# EAGLE board Interdigitated-Electrode-V2 (EAGLE 9.5.2)
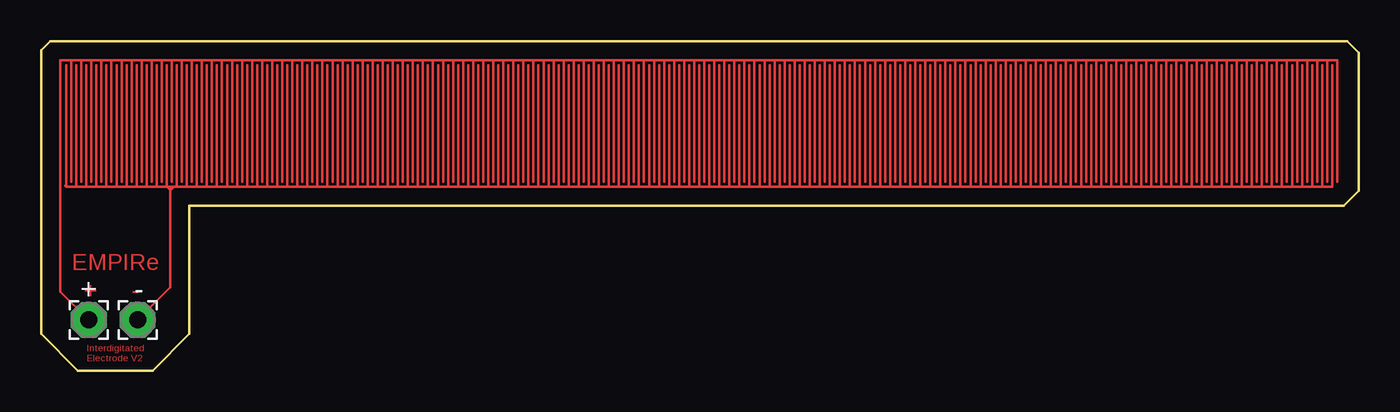
[diagram p0: board, top side]
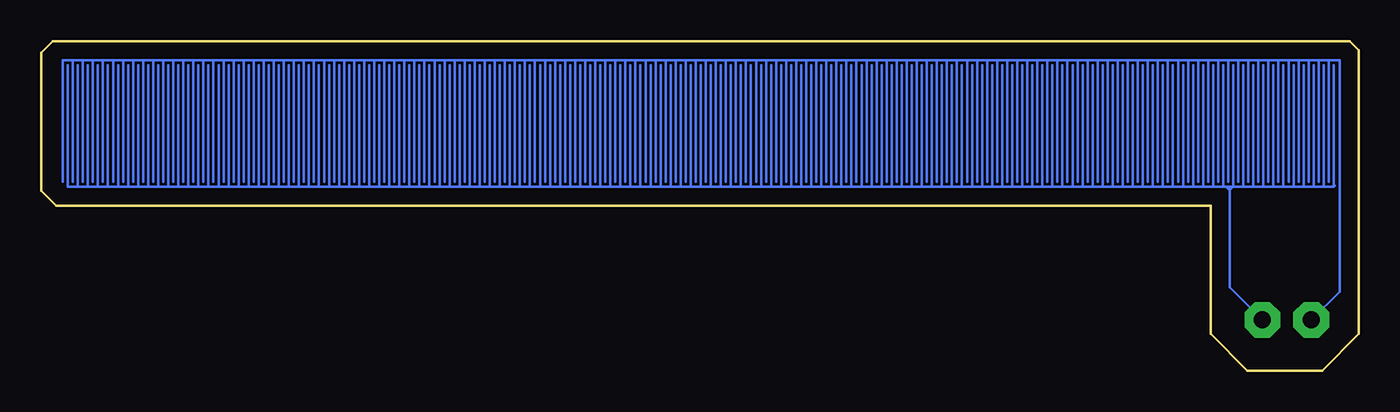
[diagram p1: board, bottom side, seen from below]

Size 80 x 20 mm. Coordinates in mm from the lower left corner, seen from the top.
Outline: 9,10 79.1,10 80,10.9 80,19.31 79.31,20 0.55,20 0,19.45 0,2.23 2.23,0 6.76,0 9,2.24 9,10
Copper layers (1*16): Top 0.035mm / dielectric 1.5mm / Bottom 0.035mm
Design rules "default": minimum track width 6mil, minimum drill 0.35mm, track to track 6mil, track to pad 6mil, pad to pad 6mil, via to via 6mil, smd to smd 6mil, copper to edge 40mil, drill to drill 6mil, minimum pad ring 10mil, minimum via ring 8mil, stop-mask expansion 4mil, vias tented up to drill 0mil, thermal gap 10mil

## Footprints (pad centres in the part's own frame; a part is rotated, then mirrored left to right if it is on the bottom)
2,15/1,0 = drill 1.016 pad 2.159 octagon: 1 0,0

## Placement (x,y rotation side)
+  [2,15/1,0]  2.89,3.08 0 top
-  [2,15/1,0]  5.86,3.08 0 top

## Library data of the parts
+ - = wirepad

## Nets
0: +.1
VCC: -.1

## Tracks (layer width: path | path; a pad name or v marks a point on that pad's centre or on a via)
0
  Top 0.152: +.1 1.17,4.8 1.17,18.83 1.83,18.83 | 1.83,18.83 2.44,18.83 | 2.44,18.83 3.05,18.83 | 3.05,18.83 3.66,18.83 | 3.66,18.83 4.27,18.83 | 4.27,18.83 4.88,18.83 | 4.88,18.83 5.49,18.83 | 5.49,18.83 6.1,18.83 | 6.1,18.83 6.71,18.83 | 6.71,18.83 7.32,18.83 | 7.32,18.83 7.93,18.83 | 7.93,18.83 8.54,18.83 | 8.54,18.83 9.15,18.83 | 9.15,18.83 9.76,18.83 | 9.76,18.83 10.37,18.83 | 10.37,18.83 10.98,18.83 | 10.98,18.83 11.59,18.83 | 11.59,18.83 12.2,18.83 | 12.2,18.83 12.81,18.83 | 12.81,18.83 13.42,18.83 | 13.42,18.83 14.03,18.83 | 14.03,18.83 14.64,18.83 | 14.64,18.83 15.25,18.83 | 15.25,18.83 15.86,18.83 | 15.86,18.83 16.47,18.83 | 16.47,18.83 17.08,18.83 | 17.08,18.83 17.69,18.83 | 17.69,18.83 18.3,18.83 | 18.3,18.83 18.91,18.83 | 18.91,18.83 19.52,18.83 | 19.52,18.83 20.13,18.83 | 20.13,18.83 20.74,18.83 | 20.74,18.83 21.35,18.83 | 21.35,18.83 21.96,18.83 | 21.96,18.83 22.57,18.83 | 22.57,18.83 23.18,18.83 | 23.18,18.83 23.79,18.83 | 23.79,18.83 24.4,18.83 | 24.4,18.83 25.01,18.83 | 25.01,18.83 25.62,18.83 | 25.62,18.83 26.23,18.83 | 26.23,18.83 26.84,18.83 | 26.84,18.83 27.45,18.83 | 27.45,18.83 28.06,18.83 | 28.06,18.83 28.67,18.83 | 28.67,18.83 29.28,18.83 | 29.28,18.83 29.89,18.83 | 29.89,18.83 30.5,18.83 | 30.5,18.83 31.11,18.83 | 31.11,18.83 31.72,18.83 | 31.72,18.83 32.33,18.83 | 32.33,18.83 32.94,18.83 | 32.94,18.83 33.55,18.83 | 33.55,18.83 34.16,18.83 | 34.16,18.83 34.77,18.83 | 34.77,18.83 35.38,18.83 | 35.38,18.83 35.99,18.83 | 35.99,18.83 36.6,18.83 | 36.6,18.83 37.21,18.83 | 37.21,18.83 37.82,18.83 | 37.82,18.83 38.43,18.83 | 38.43,18.83 39.04,18.83 | 39.04,18.83 39.65,18.83 | 39.65,18.83 40.26,18.83 | 40.26,18.83 40.87,18.83 | 40.87,18.83 41.48,18.83 | 41.48,18.83 42.09,18.83
  Top 0.152: 42.09,18.83 42.7,18.83 | 42.7,18.83 43.31,18.83 | 43.31,18.83 43.92,18.83 | 43.92,18.83 44.53,18.83 | 44.53,18.83 45.14,18.83 | 45.14,18.83 45.75,18.83 | 45.75,18.83 46.36,18.83 | 46.36,18.83 46.97,18.83 | 46.97,18.83 47.58,18.83 | 47.58,18.83 48.19,18.83 | 48.19,18.83 48.8,18.83 | 48.8,18.83 49.41,18.83 | 49.41,18.83 50.02,18.83 | 50.02,18.83 50.63,18.83 | 50.63,18.83 51.24,18.83 | 51.24,18.83 51.85,18.83 | 51.85,18.83 52.46,18.83 | 52.46,18.83 53.07,18.83 | 53.07,18.83 53.68,18.83 | 53.68,18.83 54.29,18.83 | 54.29,18.83 54.9,18.83 | 54.9,18.83 55.51,18.83 | 55.51,18.83 56.12,18.83 | 56.12,18.83 56.73,18.83 | 56.73,18.83 57.34,18.83 | 57.34,18.83 57.95,18.83 | 57.95,18.83 58.56,18.83 | 58.56,18.83 59.17,18.83 | 59.17,18.83 59.78,18.83 | 59.78,18.83 60.39,18.83 | 60.39,18.83 61,18.83 | 61,18.83 61.61,18.83 | 61.61,18.83 62.22,18.83 | 62.22,18.83 62.83,18.83 | 62.83,18.83 63.44,18.83 | 63.44,18.83 64.05,18.83 | 64.05,18.83 64.66,18.83 | 64.66,18.83 65.27,18.83 | 65.27,18.83 65.88,18.83 | 65.88,18.83 66.49,18.83 | 66.49,18.83 67.1,18.83 | 67.1,18.83 67.71,18.83 | 67.71,18.83 68.32,18.83 | 68.32,18.83 68.93,18.83 | 68.93,18.83 69.54,18.83 | 69.54,18.83 70.15,18.83 | 70.15,18.83 70.76,18.83 | 70.76,18.83 71.37,18.83 | 71.37,18.83 71.98,18.83 | 71.98,18.83 72.59,18.83 | 72.59,18.83 73.2,18.83 | 73.2,18.83 73.81,18.83 | 73.81,18.83 74.42,18.83 | 74.42,18.83 75.03,18.83 | 75.03,18.83 75.64,18.83 | 75.64,18.83 76.25,18.83 | 76.25,18.83 76.86,18.83 | 76.86,18.83 77.47,18.83 | 77.47,18.83 78.08,18.83 | 78.08,18.83 78.69,18.83 78.69,11.47 | 1.83,18.83 1.83,11.47 | 2.44,18.83 2.44,11.47 | 3.05,18.83 3.05,11.47 | 3.66,18.83 3.66,11.47 | 4.27,18.83 4.27,11.47 | 4.88,18.83 4.88,11.47
  Top 0.152: 5.49,18.83 5.49,11.47 | 6.1,18.83 6.1,11.47 | 6.71,18.83 6.71,11.47 | 7.32,18.83 7.32,11.47 | 7.93,18.83 7.93,11.47 | 8.54,18.83 8.54,11.47 | 9.15,18.83 9.15,11.47 | 9.76,18.83 9.76,11.47 | 10.37,18.83 10.37,11.47 | 10.98,18.83 10.98,11.47 | 11.59,18.83 11.59,11.47 | 12.2,18.83 12.2,11.47 | 12.81,18.83 12.81,11.47 | 13.42,18.83 13.42,11.47 | 14.03,18.83 14.03,11.47 | 14.64,18.83 14.64,11.47 | 15.25,18.83 15.25,11.47 | 15.86,18.83 15.86,11.47 | 16.47,18.83 16.47,11.47 | 17.08,18.83 17.08,11.47 | 17.69,18.83 17.69,11.47 | 18.3,18.83 18.3,11.47 | 18.91,18.83 18.91,11.47 | 19.52,18.83 19.52,11.47 | 20.13,18.83 20.13,11.47 | 20.74,18.83 20.74,11.47 | 21.35,18.83 21.35,11.47 | 21.96,18.83 21.96,11.47 | 22.57,18.83 22.57,11.47 | 23.18,18.83 23.18,11.47 | 23.79,18.83 23.79,11.47 | 24.4,18.83 24.4,11.47 | 25.01,18.83 25.01,11.47 | 25.62,18.83 25.62,11.47 | 26.23,18.83 26.23,11.47 | 26.84,18.83 26.84,11.47 | 27.45,18.83 27.45,11.47 | 28.06,18.83 28.06,11.47 | 28.67,18.83 28.67,11.47 | 29.28,18.83 29.28,11.47 | 29.89,18.83 29.89,11.47 | 30.5,18.83 30.5,11.47 | 31.11,18.83 31.11,11.47 | 31.72,18.83 31.72,11.47 | 32.33,18.83 32.33,11.47 | 32.94,18.83 32.94,11.47 | 33.55,18.83 33.55,11.47 | 34.16,18.83 34.16,11.47 | 34.77,18.83 34.77,11.47 | 35.38,18.83 35.38,11.47 | 35.99,18.83 35.99,11.47 | 36.6,18.83 36.6,11.47 | 37.21,18.83 37.21,11.47 | 37.82,18.83 37.82,11.47 | 38.43,18.83 38.43,11.47 | 39.04,18.83 39.04,11.47 | 39.65,18.83 39.65,11.47 | 40.26,18.83 40.26,11.47 | 40.87,18.83 40.87,11.47 | 41.48,18.83 41.48,11.47 | 42.09,18.83 42.09,11.47 | 42.7,18.83 42.7,11.47 | 43.31,18.83 43.31,11.47 | 43.92,18.83 43.92,11.47 | 44.53,18.83 44.53,11.47 | 45.14,18.83 45.14,11.47 | 45.75,18.83 45.75,11.47
  Top 0.152: 46.36,18.83 46.36,11.47 | 46.97,18.83 46.97,11.47 | 47.58,18.83 47.58,11.47 | 48.19,18.83 48.19,11.47 | 48.8,18.83 48.8,11.47 | 49.41,18.83 49.41,11.47 | 50.02,18.83 50.02,11.47 | 50.63,18.83 50.63,11.47 | 51.24,18.83 51.24,11.47 | 51.85,18.83 51.85,11.47 | 52.46,18.83 52.46,11.47 | 53.07,18.83 53.07,11.47 | 53.68,18.83 53.68,11.47 | 54.29,18.83 54.29,11.47 | 54.9,18.83 54.9,11.47 | 55.51,18.83 55.51,11.47 | 56.12,18.83 56.12,11.47 | 56.73,18.83 56.73,11.47 | 57.34,18.83 57.34,11.47 | 57.95,18.83 57.95,11.47 | 58.56,18.83 58.56,11.47 | 59.17,18.83 59.17,11.47 | 59.78,18.83 59.78,11.47 | 60.39,18.83 60.39,11.47 | 61,18.83 61,11.47 | 61.61,18.83 61.61,11.47 | 62.22,18.83 62.22,11.47 | 62.83,18.83 62.83,11.47 | 63.44,18.83 63.44,11.47 | 64.05,18.83 64.05,11.47 | 64.66,18.83 64.66,11.47 | 65.27,18.83 65.27,11.47 | 65.88,18.83 65.88,11.47 | 66.49,18.83 66.49,11.47 | 67.1,18.83 67.1,11.47 | 67.71,18.83 67.71,11.47 | 68.32,18.83 68.32,11.47 | 68.93,18.83 68.93,11.47 | 69.54,18.83 69.54,11.47 | 70.15,18.83 70.15,11.47 | 70.76,18.83 70.76,11.47 | 71.37,18.83 71.37,11.47 | 71.98,18.83 71.98,11.47 | 72.59,18.83 72.59,11.47 | 73.2,18.83 73.2,11.47 | 73.81,18.83 73.81,11.47 | 74.42,18.83 74.42,11.47 | 75.03,18.83 75.03,11.47 | 75.64,18.83 75.64,11.47 | 76.25,18.83 76.25,11.47 | 76.86,18.83 76.86,11.47 | 77.47,18.83 77.47,11.47 | 78.08,18.83 78.08,11.47
1
  Bottom 0.152: 2.89,3.08 1.17,4.8 1.17,18.83 1.83,18.83 | 1.83,18.83 2.44,18.83 | 2.44,18.83 3.05,18.83 | 3.05,18.83 3.66,18.83 | 3.66,18.83 4.27,18.83 | 4.27,18.83 4.88,18.83 | 4.88,18.83 5.49,18.83 | 5.49,18.83 6.1,18.83 | 6.1,18.83 6.71,18.83 | 6.71,18.83 7.32,18.83 | 7.32,18.83 7.93,18.83 | 7.93,18.83 8.54,18.83 | 8.54,18.83 9.15,18.83 | 9.15,18.83 9.76,18.83 | 9.76,18.83 10.37,18.83 | 10.37,18.83 10.98,18.83 | 10.98,18.83 11.59,18.83 | 11.59,18.83 12.2,18.83 | 12.2,18.83 12.81,18.83 | 12.81,18.83 13.42,18.83 | 13.42,18.83 14.03,18.83 | 14.03,18.83 14.64,18.83 | 14.64,18.83 15.25,18.83 | 15.25,18.83 15.86,18.83 | 15.86,18.83 16.47,18.83 | 16.47,18.83 17.08,18.83 | 17.08,18.83 17.69,18.83 | 17.69,18.83 18.3,18.83 | 18.3,18.83 18.91,18.83 | 18.91,18.83 19.52,18.83 | 19.52,18.83 20.13,18.83 | 20.13,18.83 20.74,18.83 | 20.74,18.83 21.35,18.83 | 21.35,18.83 21.96,18.83 | 21.96,18.83 22.57,18.83 | 22.57,18.83 23.18,18.83 | 23.18,18.83 23.79,18.83 | 23.79,18.83 24.4,18.83 | 24.4,18.83 25.01,18.83 | 25.01,18.83 25.62,18.83 | 25.62,18.83 26.23,18.83 | 26.23,18.83 26.84,18.83 | 26.84,18.83 27.45,18.83 | 27.45,18.83 28.06,18.83 | 28.06,18.83 28.67,18.83 | 28.67,18.83 29.28,18.83 | 29.28,18.83 29.89,18.83 | 29.89,18.83 30.5,18.83 | 30.5,18.83 31.11,18.83 | 31.11,18.83 31.72,18.83 | 31.72,18.83 32.33,18.83 | 32.33,18.83 32.94,18.83 | 32.94,18.83 33.55,18.83 | 33.55,18.83 34.16,18.83 | 34.16,18.83 34.77,18.83 | 34.77,18.83 35.38,18.83 | 35.38,18.83 35.99,18.83 | 35.99,18.83 36.6,18.83 | 36.6,18.83 37.21,18.83 | 37.21,18.83 37.82,18.83 | 37.82,18.83 38.43,18.83 | 38.43,18.83 39.04,18.83 | 39.04,18.83 39.65,18.83 | 39.65,18.83 40.26,18.83 | 40.26,18.83 40.87,18.83 | 40.87,18.83 41.48,18.83 | 41.48,18.83 42.09,18.83
  Bottom 0.152: 42.09,18.83 42.7,18.83 | 42.7,18.83 43.31,18.83 | 43.31,18.83 43.92,18.83 | 43.92,18.83 44.53,18.83 | 44.53,18.83 45.14,18.83 | 45.14,18.83 45.75,18.83 | 45.75,18.83 46.36,18.83 | 46.36,18.83 46.97,18.83 | 46.97,18.83 47.58,18.83 | 47.58,18.83 48.19,18.83 | 48.19,18.83 48.8,18.83 | 48.8,18.83 49.41,18.83 | 49.41,18.83 50.02,18.83 | 50.02,18.83 50.63,18.83 | 50.63,18.83 51.24,18.83 | 51.24,18.83 51.85,18.83 | 51.85,18.83 52.46,18.83 | 52.46,18.83 53.07,18.83 | 53.07,18.83 53.68,18.83 | 53.68,18.83 54.29,18.83 | 54.29,18.83 54.9,18.83 | 54.9,18.83 55.51,18.83 | 55.51,18.83 56.12,18.83 | 56.12,18.83 56.73,18.83 | 56.73,18.83 57.34,18.83 | 57.34,18.83 57.95,18.83 | 57.95,18.83 58.56,18.83 | 58.56,18.83 59.17,18.83 | 59.17,18.83 59.78,18.83 | 59.78,18.83 60.39,18.83 | 60.39,18.83 61,18.83 | 61,18.83 61.61,18.83 | 61.61,18.83 62.22,18.83 | 62.22,18.83 62.83,18.83 | 62.83,18.83 63.44,18.83 | 63.44,18.83 64.05,18.83 | 64.05,18.83 64.66,18.83 | 64.66,18.83 65.27,18.83 | 65.27,18.83 65.88,18.83 | 65.88,18.83 66.49,18.83 | 66.49,18.83 67.1,18.83 | 67.1,18.83 67.71,18.83 | 67.71,18.83 68.32,18.83 | 68.32,18.83 68.93,18.83 | 68.93,18.83 69.54,18.83 | 69.54,18.83 70.15,18.83 | 70.15,18.83 70.76,18.83 | 70.76,18.83 71.37,18.83 | 71.37,18.83 71.98,18.83 | 71.98,18.83 72.59,18.83 | 72.59,18.83 73.2,18.83 | 73.2,18.83 73.81,18.83 | 73.81,18.83 74.42,18.83 | 74.42,18.83 75.03,18.83 | 75.03,18.83 75.64,18.83 | 75.64,18.83 76.25,18.83 | 76.25,18.83 76.86,18.83 | 76.86,18.83 77.47,18.83 | 77.47,18.83 78.08,18.83 | 78.08,18.83 78.69,18.83 78.69,11.47 | 1.83,18.83 1.83,11.47 | 2.44,18.83 2.44,11.47 | 3.05,18.83 3.05,11.47 | 3.66,18.83 3.66,11.47 | 4.27,18.83 4.27,11.47 | 4.88,18.83 4.88,11.47
  Bottom 0.152: 5.49,18.83 5.49,11.47 | 6.1,18.83 6.1,11.47 | 6.71,18.83 6.71,11.47 | 7.32,18.83 7.32,11.47 | 7.93,18.83 7.93,11.47 | 8.54,18.83 8.54,11.47 | 9.15,18.83 9.15,11.47 | 9.76,18.83 9.76,11.47 | 10.37,18.83 10.37,11.47 | 10.98,18.83 10.98,11.47 | 11.59,18.83 11.59,11.47 | 12.2,18.83 12.2,11.47 | 12.81,18.83 12.81,11.47 | 13.42,18.83 13.42,11.47 | 14.03,18.83 14.03,11.47 | 14.64,18.83 14.64,11.47 | 15.25,18.83 15.25,11.47 | 15.86,18.83 15.86,11.47 | 16.47,18.83 16.47,11.47 | 17.08,18.83 17.08,11.47 | 17.69,18.83 17.69,11.47 | 18.3,18.83 18.3,11.47 | 18.91,18.83 18.91,11.47 | 19.52,18.83 19.52,11.47 | 20.13,18.83 20.13,11.47 | 20.74,18.83 20.74,11.47 | 21.35,18.83 21.35,11.47 | 21.96,18.83 21.96,11.47 | 22.57,18.83 22.57,11.47 | 23.18,18.83 23.18,11.47 | 23.79,18.83 23.79,11.47 | 24.4,18.83 24.4,11.47 | 25.01,18.83 25.01,11.47 | 25.62,18.83 25.62,11.47 | 26.23,18.83 26.23,11.47 | 26.84,18.83 26.84,11.47 | 27.45,18.83 27.45,11.47 | 28.06,18.83 28.06,11.47 | 28.67,18.83 28.67,11.47 | 29.28,18.83 29.28,11.47 | 29.89,18.83 29.89,11.47 | 30.5,18.83 30.5,11.47 | 31.11,18.83 31.11,11.47 | 31.72,18.83 31.72,11.47 | 32.33,18.83 32.33,11.47 | 32.94,18.83 32.94,11.47 | 33.55,18.83 33.55,11.47 | 34.16,18.83 34.16,11.47 | 34.77,18.83 34.77,11.47 | 35.38,18.83 35.38,11.47 | 35.99,18.83 35.99,11.47 | 36.6,18.83 36.6,11.47 | 37.21,18.83 37.21,11.47 | 37.82,18.83 37.82,11.47 | 38.43,18.83 38.43,11.47 | 39.04,18.83 39.04,11.47 | 39.65,18.83 39.65,11.47 | 40.26,18.83 40.26,11.47 | 40.87,18.83 40.87,11.47 | 41.48,18.83 41.48,11.47 | 42.09,18.83 42.09,11.47 | 42.7,18.83 42.7,11.47 | 43.31,18.83 43.31,11.47 | 43.92,18.83 43.92,11.47 | 44.53,18.83 44.53,11.47 | 45.14,18.83 45.14,11.47 | 45.75,18.83 45.75,11.47
  Bottom 0.152: 46.36,18.83 46.36,11.47 | 46.97,18.83 46.97,11.47 | 47.58,18.83 47.58,11.47 | 48.19,18.83 48.19,11.47 | 48.8,18.83 48.8,11.47 | 49.41,18.83 49.41,11.47 | 50.02,18.83 50.02,11.47 | 50.63,18.83 50.63,11.47 | 51.24,18.83 51.24,11.47 | 51.85,18.83 51.85,11.47 | 52.46,18.83 52.46,11.47 | 53.07,18.83 53.07,11.47 | 53.68,18.83 53.68,11.47 | 54.29,18.83 54.29,11.47 | 54.9,18.83 54.9,11.47 | 55.51,18.83 55.51,11.47 | 56.12,18.83 56.12,11.47 | 56.73,18.83 56.73,11.47 | 57.34,18.83 57.34,11.47 | 57.95,18.83 57.95,11.47 | 58.56,18.83 58.56,11.47 | 59.17,18.83 59.17,11.47 | 59.78,18.83 59.78,11.47 | 60.39,18.83 60.39,11.47 | 61,18.83 61,11.47 | 61.61,18.83 61.61,11.47 | 62.22,18.83 62.22,11.47 | 62.83,18.83 62.83,11.47 | 63.44,18.83 63.44,11.47 | 64.05,18.83 64.05,11.47 | 64.66,18.83 64.66,11.47 | 65.27,18.83 65.27,11.47 | 65.88,18.83 65.88,11.47 | 66.49,18.83 66.49,11.47 | 67.1,18.83 67.1,11.47 | 67.71,18.83 67.71,11.47 | 68.32,18.83 68.32,11.47 | 68.93,18.83 68.93,11.47 | 69.54,18.83 69.54,11.47 | 70.15,18.83 70.15,11.47 | 70.76,18.83 70.76,11.47 | 71.37,18.83 71.37,11.47 | 71.98,18.83 71.98,11.47 | 72.59,18.83 72.59,11.47 | 73.2,18.83 73.2,11.47 | 73.81,18.83 73.81,11.47 | 74.42,18.83 74.42,11.47 | 75.03,18.83 75.03,11.47 | 75.64,18.83 75.64,11.47 | 76.25,18.83 76.25,11.47 | 76.86,18.83 76.86,11.47 | 77.47,18.83 77.47,11.47 | 78.08,18.83 78.08,11.47
VCC
  Top 0.152: -.1 7.83,5.05 7.83,10.92 | 1.52,11.17 2.13,11.17 | 2.13,11.17 2.74,11.17 | 2.74,11.17 3.35,11.17 | 3.35,11.17 3.96,11.17 | 3.96,11.17 4.57,11.17 | 4.57,11.17 5.18,11.17 | 5.18,11.17 5.79,11.17 | 5.79,11.17 6.4,11.17 | 6.4,11.17 7.01,11.17 | 7.01,11.17 7.62,11.17 | 7.62,11.17 | 7.62,11.17 7.92,11.17 | 7.92,11.17 8.08,11.17 | 8.08,11.17 8.23,11.17 | 8.23,11.17 8.84,11.17 | 8.84,11.17 9.45,11.17 | 9.45,11.17 10.06,11.17 | 10.06,11.17 10.67,11.17 | 10.67,11.17 11.28,11.17 | 11.28,11.17 11.89,11.17 | 11.89,11.17 12.5,11.17 | 12.5,11.17 13.11,11.17 | 13.11,11.17 13.72,11.17 | 13.72,11.17 14.33,11.17 | 14.33,11.17 14.94,11.17 | 14.94,11.17 15.55,11.17 | 15.55,11.17 16.16,11.17 | 16.16,11.17 16.77,11.17 | 16.77,11.17 17.38,11.17 | 17.38,11.17 17.99,11.17 | 17.99,11.17 18.6,11.17 | 18.6,11.17 19.21,11.17 | 19.21,11.17 19.82,11.17 | 19.82,11.17 20.43,11.17 | 20.43,11.17 21.04,11.17 | 21.04,11.17 21.65,11.17 | 21.65,11.17 22.26,11.17 | 22.26,11.17 22.87,11.17 | 22.87,11.17 23.48,11.17 | 23.48,11.17 24.09,11.17 | 24.09,11.17 24.7,11.17 | 24.7,11.17 25.31,11.17 | 25.31,11.17 25.92,11.17 | 25.92,11.17 26.53,11.17 | 26.53,11.17 27.14,11.17 | 27.14,11.17 27.75,11.17 | 27.75,11.17 28.36,11.17 | 28.36,11.17 28.97,11.17 | 28.97,11.17 29.58,11.17 | 29.58,11.17 30.19,11.17 | 30.19,11.17 30.8,11.17 | 30.8,11.17 31.41,11.17 | 31.41,11.17 32.02,11.17 | 32.02,11.17 32.63,11.17 | 32.63,11.17 33.24,11.17 | 33.24,11.17 33.85,11.17 | 33.85,11.17 34.46,11.17 | 34.46,11.17 35.07,11.17 | 35.07,11.17 35.68,11.17 | 35.68,11.17 36.29,11.17 | 36.29,11.17 36.9,11.17 | 36.9,11.17 37.51,11.17 | 37.51,11.17 38.12,11.17 | 38.12,11.17 38.73,11.17 | 38.73,11.17 39.34,11.17 | 39.34,11.17 39.95,11.17 | 39.95,11.17 40.56,11.17
  Top 0.152: 40.56,11.17 41.17,11.17 | 41.17,11.17 41.78,11.17 | 41.78,11.17 42.39,11.17 | 42.39,11.17 43,11.17 | 43,11.17 43.61,11.17 | 43.61,11.17 44.22,11.17 | 44.22,11.17 44.83,11.17 | 44.83,11.17 45.44,11.17 | 45.44,11.17 46.05,11.17 | 46.05,11.17 46.66,11.17 | 46.66,11.17 47.27,11.17 | 47.27,11.17 47.88,11.17 | 47.88,11.17 48.49,11.17 | 48.49,11.17 49.1,11.17 | 49.1,11.17 49.71,11.17 | 49.71,11.17 50.32,11.17 | 50.32,11.17 50.93,11.17 | 50.93,11.17 51.54,11.17 | 51.54,11.17 52.15,11.17 | 52.15,11.17 52.76,11.17 | 52.76,11.17 53.37,11.17 | 53.37,11.17 53.98,11.17 | 53.98,11.17 54.59,11.17 | 54.59,11.17 55.2,11.17 | 55.2,11.17 55.81,11.17 | 55.81,11.17 56.42,11.17 | 56.42,11.17 57.03,11.17 | 57.03,11.17 57.64,11.17 | 57.64,11.17 58.25,11.17 | 58.25,11.17 58.86,11.17 | 58.86,11.17 59.47,11.17 | 59.47,11.17 60.08,11.17 | 60.08,11.17 60.69,11.17 | 60.69,11.17 61.3,11.17 | 61.3,11.17 61.91,11.17 | 61.91,11.17 62.52,11.17 | 62.52,11.17 63.13,11.17 | 63.13,11.17 63.74,11.17 | 63.74,11.17 64.35,11.17 | 64.35,11.17 64.96,11.17 | 64.96,11.17 65.57,11.17 | 65.57,11.17 66.18,11.17 | 66.18,11.17 66.79,11.17 | 66.79,11.17 67.4,11.17 | 67.4,11.17 68.01,11.17 | 68.01,11.17 68.62,11.17 | 68.62,11.17 69.23,11.17 | 69.23,11.17 69.84,11.17 | 69.84,11.17 70.45,11.17 | 70.45,11.17 71.06,11.17 | 71.06,11.17 71.67,11.17 | 71.67,11.17 72.28,11.17 | 72.28,11.17 72.89,11.17 | 72.89,11.17 73.5,11.17 | 73.5,11.17 74.11,11.17 | 74.11,11.17 74.72,11.17 | 74.72,11.17 75.33,11.17 | 75.33,11.17 75.94,11.17 | 75.94,11.17 76.55,11.17 | 76.55,11.17 77.16,11.17 | 77.16,11.17 77.77,11.17 | 77.77,11.17 78.38,11.17 78.38,18.53 | 1.47,11.22 1.52,11.17 | 7.92,11.17 7.83,11.07 7.83,10.96 | 8.08,11.17 7.83,10.92 | 7.83,10.92 7.83,10.96
  Top 0.152: 7.83,10.96 7.62,11.17 | 1.52,11.17 1.52,18.53 | 2.13,11.17 2.13,18.53 | 2.74,11.17 2.74,18.53 | 3.35,11.17 3.35,18.53 | 3.96,11.17 3.96,18.53 | 4.57,11.17 4.57,18.53 | 5.18,11.17 5.18,18.53 | 5.79,11.17 5.79,18.53 | 6.4,11.17 6.4,18.53 | 7.01,11.17 7.01,18.53 | 7.62,11.17 7.62,18.53 | 8.23,11.17 8.23,18.53 | 8.84,11.17 8.84,18.53 | 9.45,11.17 9.45,18.53 | 10.06,11.17 10.06,18.53 | 10.67,11.17 10.67,18.53 | 11.28,11.17 11.28,18.53 | 11.89,11.17 11.89,18.53 | 12.5,11.17 12.5,18.53 | 13.11,11.17 13.11,18.53 | 13.72,11.17 13.72,18.53 | 14.33,11.17 14.33,18.53 | 14.94,11.17 14.94,18.53 | 15.55,11.17 15.55,18.53 | 16.16,11.17 16.16,18.53 | 16.77,11.17 16.77,18.53 | 17.38,11.17 17.38,18.53 | 17.99,11.17 17.99,18.53 | 18.6,11.17 18.6,18.53 | 19.21,11.17 19.21,18.53 | 19.82,11.17 19.82,18.53 | 20.43,11.17 20.43,18.53 | 21.04,11.17 21.04,18.53 | 21.65,11.17 21.65,18.53 | 22.26,11.17 22.26,18.53 | 22.87,11.17 22.87,18.53 | 23.48,11.17 23.48,18.53 | 24.09,11.17 24.09,18.53 | 24.7,11.17 24.7,18.53 | 25.31,11.17 25.31,18.53 | 25.92,11.17 25.92,18.53 | 26.53,11.17 26.53,18.53 | 27.14,11.17 27.14,18.53 | 27.75,11.17 27.75,18.53 | 28.36,11.17 28.36,18.53 | 28.97,11.17 28.97,18.53 | 29.58,11.17 29.58,18.53 | 30.19,11.17 30.19,18.53 | 30.8,11.17 30.8,18.53 | 31.41,11.17 31.41,18.53 | 32.02,11.17 32.02,18.53 | 32.63,11.17 32.63,18.53 | 33.24,11.17 33.24,18.53 | 33.85,11.17 33.85,18.53 | 34.46,11.17 34.46,18.53 | 35.07,11.17 35.07,18.53 | 35.68,11.17 35.68,18.53 | 36.29,11.17 36.29,18.53 | 36.9,11.17 36.9,18.53 | 37.51,11.17 37.51,18.53 | 38.12,11.17 38.12,18.53 | 38.73,11.17 38.73,18.53 | 39.34,11.17 39.34,18.53 | 39.95,11.17 39.95,18.53 | 40.56,11.17 40.56,18.53 | 41.17,11.17 41.17,18.53 | 41.78,11.17 41.78,18.53
  Top 0.152: 42.39,11.17 42.39,18.53 | 43,11.17 43,18.53 | 43.61,11.17 43.61,18.53 | 44.22,11.17 44.22,18.53 | 44.83,11.17 44.83,18.53 | 45.44,11.17 45.44,18.53 | 46.05,11.17 46.05,18.53 | 46.66,11.17 46.66,18.53 | 47.27,11.17 47.27,18.53 | 47.88,11.17 47.88,18.53 | 48.49,11.17 48.49,18.53 | 49.1,11.17 49.1,18.53 | 49.71,11.17 49.71,18.53 | 50.32,11.17 50.32,18.53 | 50.93,11.17 50.93,18.53 | 51.54,11.17 51.54,18.53 | 52.15,11.17 52.15,18.53 | 52.76,11.17 52.76,18.53 | 53.37,11.17 53.37,18.53 | 53.98,11.17 53.98,18.53 | 54.59,11.17 54.59,18.53 | 55.2,11.17 55.2,18.53 | 55.81,11.17 55.81,18.53 | 56.42,11.17 56.42,18.53 | 57.03,11.17 57.03,18.53 | 57.64,11.17 57.64,18.53 | 58.25,11.17 58.25,18.53 | 58.86,11.17 58.86,18.53 | 59.47,11.17 59.47,18.53 | 60.08,11.17 60.08,18.53 | 60.69,11.17 60.69,18.53 | 61.3,11.17 61.3,18.53 | 61.91,11.17 61.91,18.53 | 62.52,11.17 62.52,18.53 | 63.13,11.17 63.13,18.53 | 63.74,11.17 63.74,18.53 | 64.35,11.17 64.35,18.53 | 64.96,11.17 64.96,18.53 | 65.57,11.17 65.57,18.53 | 66.18,11.17 66.18,18.53 | 66.79,11.17 66.79,18.53 | 67.4,11.17 67.4,18.53 | 68.01,11.17 68.01,18.53 | 68.62,11.17 68.62,18.53 | 69.23,11.17 69.23,18.53 | 69.84,11.17 69.84,18.53 | 70.45,11.17 70.45,18.53 | 71.06,11.17 71.06,18.53 | 71.67,11.17 71.67,18.53 | 72.28,11.17 72.28,18.53 | 72.89,11.17 72.89,18.53 | 73.5,11.17 73.5,18.53 | 74.11,11.17 74.11,18.53 | 74.72,11.17 74.72,18.53 | 75.33,11.17 75.33,18.53 | 75.94,11.17 75.94,18.53 | 76.55,11.17 76.55,18.53 | 77.16,11.17 77.16,18.53 | 77.77,11.17 77.77,18.53
VCC1
  Bottom 0.152: 5.86,3.08 7.83,5.05 7.83,10.92 | 1.52,11.17 2.13,11.17 | 2.13,11.17 2.74,11.17 | 2.74,11.17 3.35,11.17 | 3.35,11.17 3.96,11.17 | 3.96,11.17 4.57,11.17 | 4.57,11.17 5.18,11.17 | 5.18,11.17 5.79,11.17 | 5.79,11.17 6.4,11.17 | 6.4,11.17 7.01,11.17 | 7.01,11.17 7.62,11.17 | 7.62,11.17 | 7.62,11.17 7.92,11.17 | 7.92,11.17 8.08,11.17 | 8.08,11.17 8.23,11.17 | 8.23,11.17 8.84,11.17 | 8.84,11.17 9.45,11.17 | 9.45,11.17 10.06,11.17 | 10.06,11.17 10.67,11.17 | 10.67,11.17 11.28,11.17 | 11.28,11.17 11.89,11.17 | 11.89,11.17 12.5,11.17 | 12.5,11.17 13.11,11.17 | 13.11,11.17 13.72,11.17 | 13.72,11.17 14.33,11.17 | 14.33,11.17 14.94,11.17 | 14.94,11.17 15.55,11.17 | 15.55,11.17 16.16,11.17 | 16.16,11.17 16.77,11.17 | 16.77,11.17 17.38,11.17 | 17.38,11.17 17.99,11.17 | 17.99,11.17 18.6,11.17 | 18.6,11.17 19.21,11.17 | 19.21,11.17 19.82,11.17 | 19.82,11.17 20.43,11.17 | 20.43,11.17 21.04,11.17 | 21.04,11.17 21.65,11.17 | 21.65,11.17 22.26,11.17 | 22.26,11.17 22.87,11.17 | 22.87,11.17 23.48,11.17 | 23.48,11.17 24.09,11.17 | 24.09,11.17 24.7,11.17 | 24.7,11.17 25.31,11.17 | 25.31,11.17 25.92,11.17 | 25.92,11.17 26.53,11.17 | 26.53,11.17 27.14,11.17 | 27.14,11.17 27.75,11.17 | 27.75,11.17 28.36,11.17 | 28.36,11.17 28.97,11.17 | 28.97,11.17 29.58,11.17 | 29.58,11.17 30.19,11.17 | 30.19,11.17 30.8,11.17 | 30.8,11.17 31.41,11.17 | 31.41,11.17 32.02,11.17 | 32.02,11.17 32.63,11.17 | 32.63,11.17 33.24,11.17 | 33.24,11.17 33.85,11.17 | 33.85,11.17 34.46,11.17 | 34.46,11.17 35.07,11.17 | 35.07,11.17 35.68,11.17 | 35.68,11.17 36.29,11.17 | 36.29,11.17 36.9,11.17 | 36.9,11.17 37.51,11.17 | 37.51,11.17 38.12,11.17 | 38.12,11.17 38.73,11.17 | 38.73,11.17 39.34,11.17 | 39.34,11.17 39.95,11.17 | 39.95,11.17 40.56,11.17
  Bottom 0.152: 40.56,11.17 41.17,11.17 | 41.17,11.17 41.78,11.17 | 41.78,11.17 42.39,11.17 | 42.39,11.17 43,11.17 | 43,11.17 43.61,11.17 | 43.61,11.17 44.22,11.17 | 44.22,11.17 44.83,11.17 | 44.83,11.17 45.44,11.17 | 45.44,11.17 46.05,11.17 | 46.05,11.17 46.66,11.17 | 46.66,11.17 47.27,11.17 | 47.27,11.17 47.88,11.17 | 47.88,11.17 48.49,11.17 | 48.49,11.17 49.1,11.17 | 49.1,11.17 49.71,11.17 | 49.71,11.17 50.32,11.17 | 50.32,11.17 50.93,11.17 | 50.93,11.17 51.54,11.17 | 51.54,11.17 52.15,11.17 | 52.15,11.17 52.76,11.17 | 52.76,11.17 53.37,11.17 | 53.37,11.17 53.98,11.17 | 53.98,11.17 54.59,11.17 | 54.59,11.17 55.2,11.17 | 55.2,11.17 55.81,11.17 | 55.81,11.17 56.42,11.17 | 56.42,11.17 57.03,11.17 | 57.03,11.17 57.64,11.17 | 57.64,11.17 58.25,11.17 | 58.25,11.17 58.86,11.17 | 58.86,11.17 59.47,11.17 | 59.47,11.17 60.08,11.17 | 60.08,11.17 60.69,11.17 | 60.69,11.17 61.3,11.17 | 61.3,11.17 61.91,11.17 | 61.91,11.17 62.52,11.17 | 62.52,11.17 63.13,11.17 | 63.13,11.17 63.74,11.17 | 63.74,11.17 64.35,11.17 | 64.35,11.17 64.96,11.17 | 64.96,11.17 65.57,11.17 | 65.57,11.17 66.18,11.17 | 66.18,11.17 66.79,11.17 | 66.79,11.17 67.4,11.17 | 67.4,11.17 68.01,11.17 | 68.01,11.17 68.62,11.17 | 68.62,11.17 69.23,11.17 | 69.23,11.17 69.84,11.17 | 69.84,11.17 70.45,11.17 | 70.45,11.17 71.06,11.17 | 71.06,11.17 71.67,11.17 | 71.67,11.17 72.28,11.17 | 72.28,11.17 72.89,11.17 | 72.89,11.17 73.5,11.17 | 73.5,11.17 74.11,11.17 | 74.11,11.17 74.72,11.17 | 74.72,11.17 75.33,11.17 | 75.33,11.17 75.94,11.17 | 75.94,11.17 76.55,11.17 | 76.55,11.17 77.16,11.17 | 77.16,11.17 77.77,11.17 | 77.77,11.17 78.38,11.17 78.38,18.53 | 1.47,11.22 1.52,11.17 | 7.92,11.17 7.83,11.07 7.83,10.96 | 8.08,11.17 7.83,10.92 | 7.83,10.92 7.83,10.96
  Bottom 0.152: 7.83,10.96 7.62,11.17 | 1.52,11.17 1.52,18.53 | 2.13,11.17 2.13,18.53 | 2.74,11.17 2.74,18.53 | 3.35,11.17 3.35,18.53 | 3.96,11.17 3.96,18.53 | 4.57,11.17 4.57,18.53 | 5.18,11.17 5.18,18.53 | 5.79,11.17 5.79,18.53 | 6.4,11.17 6.4,18.53 | 7.01,11.17 7.01,18.53 | 7.62,11.17 7.62,18.53 | 8.23,11.17 8.23,18.53 | 8.84,11.17 8.84,18.53 | 9.45,11.17 9.45,18.53 | 10.06,11.17 10.06,18.53 | 10.67,11.17 10.67,18.53 | 11.28,11.17 11.28,18.53 | 11.89,11.17 11.89,18.53 | 12.5,11.17 12.5,18.53 | 13.11,11.17 13.11,18.53 | 13.72,11.17 13.72,18.53 | 14.33,11.17 14.33,18.53 | 14.94,11.17 14.94,18.53 | 15.55,11.17 15.55,18.53 | 16.16,11.17 16.16,18.53 | 16.77,11.17 16.77,18.53 | 17.38,11.17 17.38,18.53 | 17.99,11.17 17.99,18.53 | 18.6,11.17 18.6,18.53 | 19.21,11.17 19.21,18.53 | 19.82,11.17 19.82,18.53 | 20.43,11.17 20.43,18.53 | 21.04,11.17 21.04,18.53 | 21.65,11.17 21.65,18.53 | 22.26,11.17 22.26,18.53 | 22.87,11.17 22.87,18.53 | 23.48,11.17 23.48,18.53 | 24.09,11.17 24.09,18.53 | 24.7,11.17 24.7,18.53 | 25.31,11.17 25.31,18.53 | 25.92,11.17 25.92,18.53 | 26.53,11.17 26.53,18.53 | 27.14,11.17 27.14,18.53 | 27.75,11.17 27.75,18.53 | 28.36,11.17 28.36,18.53 | 28.97,11.17 28.97,18.53 | 29.58,11.17 29.58,18.53 | 30.19,11.17 30.19,18.53 | 30.8,11.17 30.8,18.53 | 31.41,11.17 31.41,18.53 | 32.02,11.17 32.02,18.53 | 32.63,11.17 32.63,18.53 | 33.24,11.17 33.24,18.53 | 33.85,11.17 33.85,18.53 | 34.46,11.17 34.46,18.53 | 35.07,11.17 35.07,18.53 | 35.68,11.17 35.68,18.53 | 36.29,11.17 36.29,18.53 | 36.9,11.17 36.9,18.53 | 37.51,11.17 37.51,18.53 | 38.12,11.17 38.12,18.53 | 38.73,11.17 38.73,18.53 | 39.34,11.17 39.34,18.53 | 39.95,11.17 39.95,18.53 | 40.56,11.17 40.56,18.53 | 41.17,11.17 41.17,18.53 | 41.78,11.17 41.78,18.53
  Bottom 0.152: 42.39,11.17 42.39,18.53 | 43,11.17 43,18.53 | 43.61,11.17 43.61,18.53 | 44.22,11.17 44.22,18.53 | 44.83,11.17 44.83,18.53 | 45.44,11.17 45.44,18.53 | 46.05,11.17 46.05,18.53 | 46.66,11.17 46.66,18.53 | 47.27,11.17 47.27,18.53 | 47.88,11.17 47.88,18.53 | 48.49,11.17 48.49,18.53 | 49.1,11.17 49.1,18.53 | 49.71,11.17 49.71,18.53 | 50.32,11.17 50.32,18.53 | 50.93,11.17 50.93,18.53 | 51.54,11.17 51.54,18.53 | 52.15,11.17 52.15,18.53 | 52.76,11.17 52.76,18.53 | 53.37,11.17 53.37,18.53 | 53.98,11.17 53.98,18.53 | 54.59,11.17 54.59,18.53 | 55.2,11.17 55.2,18.53 | 55.81,11.17 55.81,18.53 | 56.42,11.17 56.42,18.53 | 57.03,11.17 57.03,18.53 | 57.64,11.17 57.64,18.53 | 58.25,11.17 58.25,18.53 | 58.86,11.17 58.86,18.53 | 59.47,11.17 59.47,18.53 | 60.08,11.17 60.08,18.53 | 60.69,11.17 60.69,18.53 | 61.3,11.17 61.3,18.53 | 61.91,11.17 61.91,18.53 | 62.52,11.17 62.52,18.53 | 63.13,11.17 63.13,18.53 | 63.74,11.17 63.74,18.53 | 64.35,11.17 64.35,18.53 | 64.96,11.17 64.96,18.53 | 65.57,11.17 65.57,18.53 | 66.18,11.17 66.18,18.53 | 66.79,11.17 66.79,18.53 | 67.4,11.17 67.4,18.53 | 68.01,11.17 68.01,18.53 | 68.62,11.17 68.62,18.53 | 69.23,11.17 69.23,18.53 | 69.84,11.17 69.84,18.53 | 70.45,11.17 70.45,18.53 | 71.06,11.17 71.06,18.53 | 71.67,11.17 71.67,18.53 | 72.28,11.17 72.28,18.53 | 72.89,11.17 72.89,18.53 | 73.5,11.17 73.5,18.53 | 74.11,11.17 74.11,18.53 | 74.72,11.17 74.72,18.53 | 75.33,11.17 75.33,18.53 | 75.94,11.17 75.94,18.53 | 76.55,11.17 76.55,18.53 | 77.16,11.17 77.16,18.53 | 77.77,11.17 77.77,18.53

## Text on the board
Top: EMPIRe | + | - | Interdigitated / Electrode V2